# EAGLE board MAX3000A-CPLDbreakout-v1 (EAGLE 5.11)
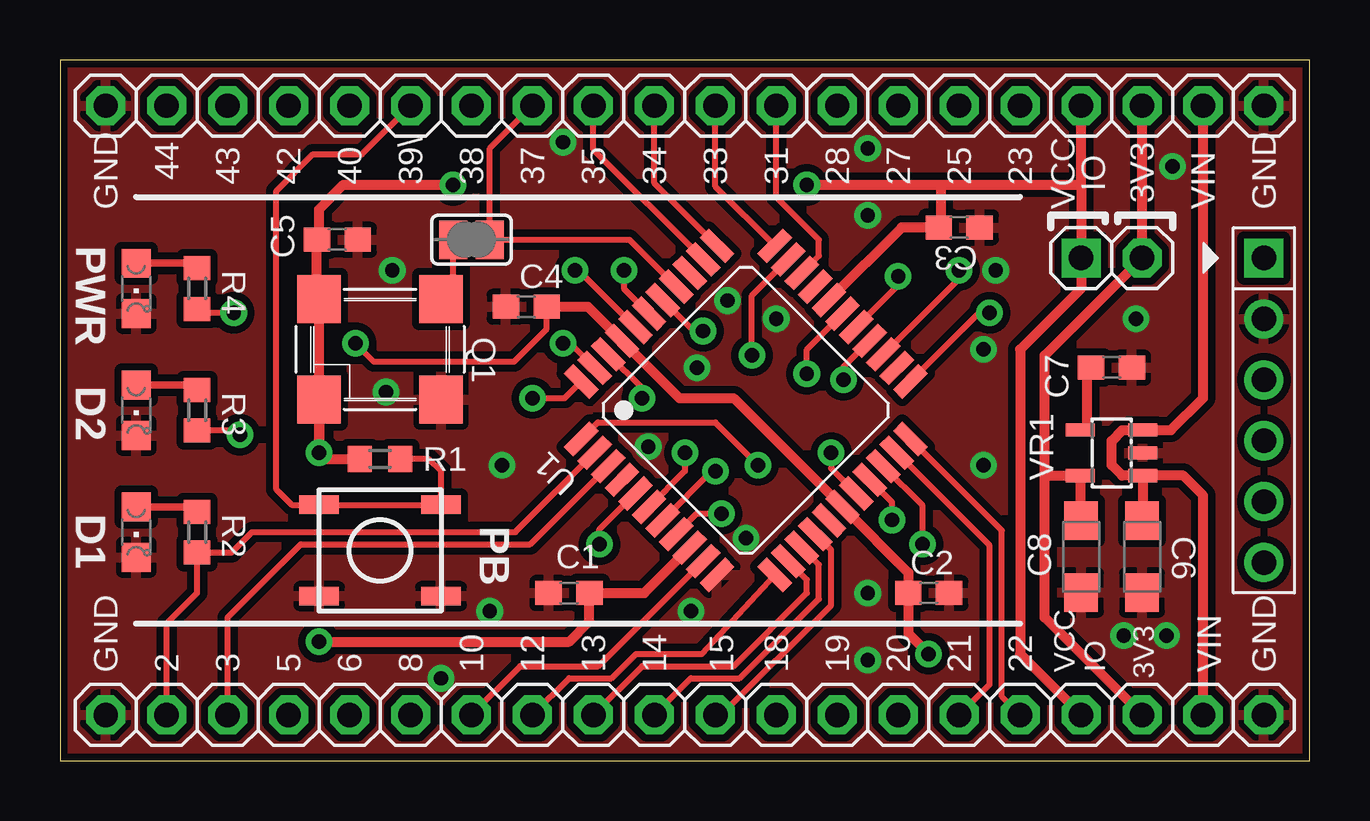
[diagram p0: board, top side]
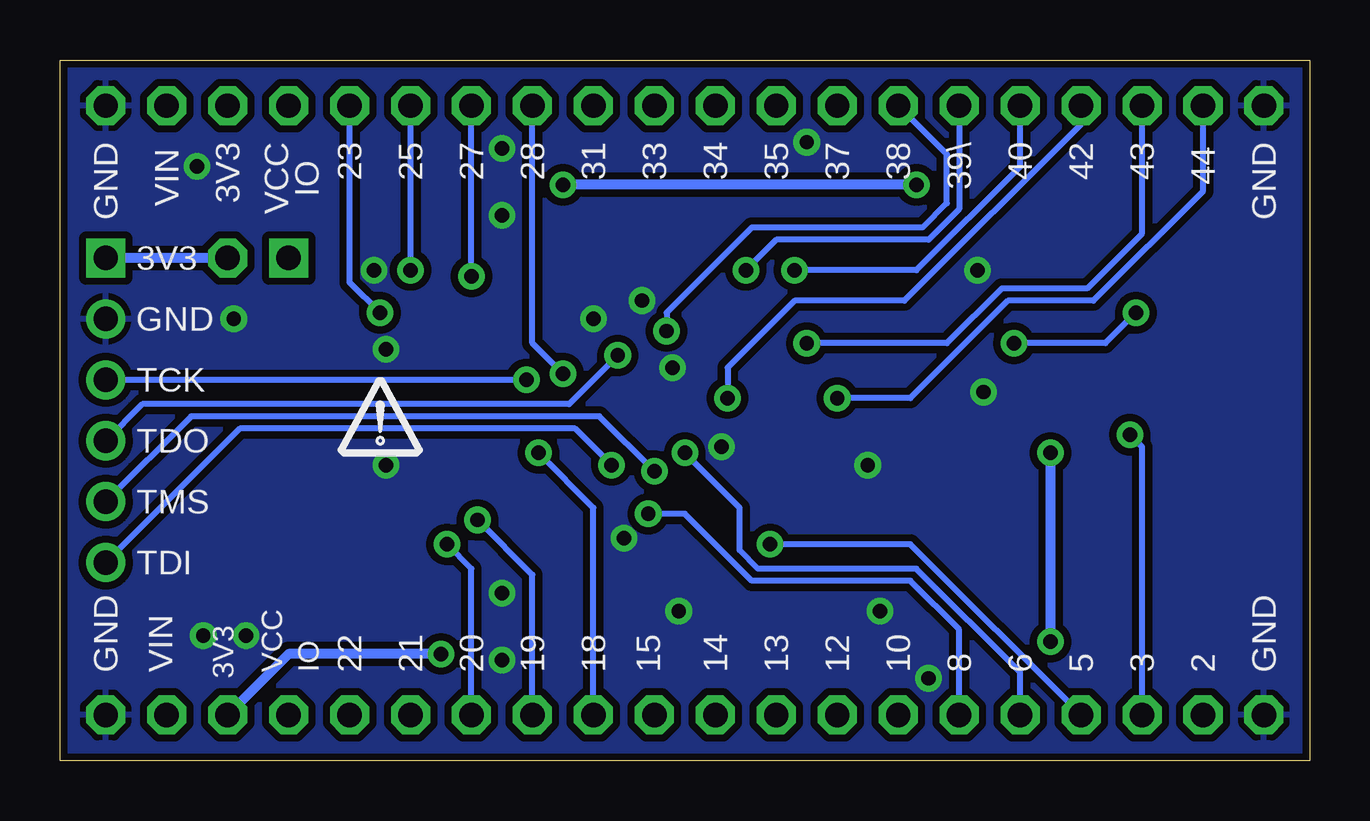
[diagram p1: board, bottom side, seen from below]

Size 52.07 x 29.21 mm. Coordinates in mm from the lower left corner, seen from the top.
Outline: 0,0 52.07,0 52.07,29.21 0,29.21 0,0
Copper layers (1*16): Top 0.035mm / dielectric 1.5mm / Bottom 0.035mm
Design rules "SparkFun": minimum track width 8mil, minimum drill 20mil, track to track 8mil, track to pad 8mil, pad to pad 8mil, via to via 8mil, smd to smd 8mil, copper to edge 10mil, drill to drill 8mil, minimum pad ring 12mil, minimum via ring 10mil, stop-mask expansion 4mil, vias tented up to drill 25mil, thermal gap 10mil

## Footprints (pad centres in the part's own frame; a part is rotated, then mirrored left to right if it is on the bottom)
C603 = smd 1.1 x 1: 1 -0.85,0; 2 0.85,0
SMC_A = smd 1.6 x 1.4: + -1.5,0; - 1.5,0
HEADER_PRG_1X06 = drill 1.016 square: 1 -6.35,0 | drill 1.016 round: 2 -3.81,0; 3 -1.27,0; 4 1.27,0; 5 3.81,0; 6 6.35,0
LED-805 = smd 1.2 x 1.2: A 0,-1.05; C 0,1.05
1X20 = drill 1.016 octagon: 1 -24.13,0; 2 -21.59,0; 3 -19.05,0; 4 -16.51,0; 5 -13.97,0; 6 -11.43,0; 7 -8.89,0; 8 -6.35,0; 9 -3.81,0; 10 -1.27,0; 11 1.27,0; 12 3.81,0; 13 6.35,0; 14 8.89,0; 15 11.43,0; 16 13.97,0; 17 16.51,0; 18 19.05,0; 19 21.59,0; 20 24.13,0
1X02-S = drill 1.016 square: 1 -1.27,0 | drill 1.016 octagon: 2 1.27,0
TACT_SWITCH_SMALL = smd 1.651 x 0.762: 1 -2.54,1.905; 2 2.54,1.905; 3 -2.54,-1.905; 4 2.54,-1.905
OSCILLATOR_7X5_SMD = smd 1.8 x 2: 1 -2.54,-2.1; 2 2.54,-2.1; 3 2.54,2.1; 4 -2.54,2.1
R603 = smd 1 x 1.1: 1 -0.85,0; 2 0.85,0
SJ = smd 1.168 x 1.6: 1 -0.762,0; 2 0.762,0
TQFP44 = smd 0.55 x 1.5: P1 -4,-5.7; P2 -3.2,-5.7; P3 -2.4,-5.7; P4 -1.6,-5.7; P5 -0.8,-5.7; P6 0,-5.7; P7 0.8,-5.7; P8 1.6,-5.7; P9 2.4,-5.7; P10 3.2,-5.7; P11 4,-5.7; P23 4,5.7; P24 3.2,5.7; P25 2.4,5.7; P26 1.6,5.7; P27 0.8,5.7; P28 0,5.7; P29 -0.8,5.7; P30 -1.6,5.7; P31 -2.4,5.7; P32 -3.2,5.7; P33 -4,5.7 | smd 1.5 x 0.55: P12 5.7,-4; P13 5.7,-3.2; P14 5.7,-2.4; P15 5.7,-1.6; P16 5.7,-0.8; P17 5.7,0; P18 5.7,0.8; P19 5.7,1.6; P20 5.7,2.4; P21 5.7,3.2; P22 5.7,4; P34 -5.7,4; P35 -5.7,3.2; P36 -5.7,2.4; P37 -5.7,1.6; P38 -5.7,0.8; P39 -5.7,0; P40 -5.7,-0.8; P41 -5.7,-1.6; P42 -5.7,-2.4; P43 -5.7,-3.2; P44 -5.7,-4
SOT-23-5 = smd 0.55 x 1.2: 1 -0.95,-1.3; 2 0,-1.3; 3 0.95,-1.3; 4 0.95,1.3; 5 -0.95,1.3

## Placement (x,y rotation side)
C1  0.1uF  [C603]  21.21,6.99 180 top
C2  0.1uF  [C603]  36.2,6.99 0 top
C3  0.1uF  [C603]  37.47,22.22 0 top
C4  0.1uF  [C603]  19.43,18.92 180 top
C5  0.1uF  [C603]  11.56,21.72 0 top
C6  3.3uF  [SMC_A]  45.09,8.51 270 top
C7  470pF  [C603]  43.82,16.38 0 top
C8  3.3uF  [SMC_A]  42.55,8.51 270 top
CON1  HEADER_PRG_XILINX_JTAG6  [HEADER_PRG_1X06]  50.16,14.61 270 top
D1  Yellow LED  [LED-805]  3.17,9.53 180 top
D2  Yellow LED  [LED-805]  3.17,14.61 180 top
IO1  [1X20]  26.04,27.3 0 top
IO2  [1X20]  26.04,1.91 0 top
JP1  [1X02-S]  43.82,20.95 0 top
PB  SMD button small  [TACT_SWITCH_SMALL]  13.34,8.76 180 top
PWR  Yellow LED  [LED-805]  3.17,19.68 180 top
Q1  OSC-OSCILLATOR  [OSCILLATOR_7X5_SMD]  13.34,17.14 0 top
R1  10K  [R603]  13.34,12.57 180 top
R2  2K  [R603]  5.71,9.53 270 top
R3  2K  [R603]  5.71,14.61 270 top
R4  2K  [R603]  5.71,19.68 270 top
SJ1  [SJ]  17.14,21.72 0 top
U1  EPM3064A-TQFP44  [TQFP44]  28.57,14.61 315 top
U$1  DP_LOGO  [DP_LOGO]  38.73,13.34 0 bottom
VR1  3.3 VREG  [SOT-23-5]  43.82,12.83 90 top

## Library data of the parts
C1-C8 CON1 D1 D2 PB PWR Q1 R1-R4 U1 VR1 = dp_devices
IO1 IO2 = pinhead
JP1 = pinhead-2
SJ1 = jumper
U$1 = dp_devices; FF1: fullfillment by; FF2: Seeed studio; FF3: www.seeedstudio.com; LICENSE: CC-BY-SA MAY 2011; PROJECT: Altera MAX3000A CPLD DEV BOARD v1.0; URL1: http://; URL2: DangerousPrototypes.com

## Nets
2: IO2.2 R2.2 U1.P2
3: IO2.3 R3.2 U1.P3
5: IO2.4 U1.P5
6: IO2.5 U1.P6
8: IO2.6 U1.P8
10: IO2.7 U1.P10
12: IO2.8 U1.P12
13: IO2.9 U1.P13
14: IO2.10 U1.P14
15: IO2.11 U1.P15
18: IO2.12 U1.P18
19: IO2.13 U1.P19
20: IO2.14 U1.P20
21: IO2.15 U1.P21
22: IO2.16 U1.P22
23: IO1.16 U1.P23
25: IO1.15 U1.P25
27: IO1.14 U1.P27
28: IO1.13 U1.P28
31: IO1.12 U1.P31
33: IO1.11 U1.P33
34: IO1.10 U1.P34
35: IO1.9 U1.P35
37: IO1.8 SJ1.2 U1.P37
38: IO1.7 U1.P38
39: IO1.6 PB.3 PB.4 R1.1 U1.P39
40: IO1.5 U1.P40
42: IO1.4 U1.P42
43: IO1.3 U1.P43
44: IO1.2 U1.P44
+3V3: C2.1 C4.1 C8.+ CON1.1 IO1.18 IO2.18 JP1.2 R4.2 U1.P17 U1.P41 VR1.5
GND: C1.2 C2.2 C3.2 C4.2 C5.2 C6.- C7.2 C8.- CON1.2 D1.C D2.C IO1.1 IO1.20 IO2.1 IO2.20 PB.1 PB.2 PWR.C Q1.2 U1.P4 U1.P11 U1.P16 U1.P24 U1.P30 U1.P36 VR1.2
JTAG_TCK: CON1.3 U1.P26
JTAG_TDI: CON1.6 U1.P1
JTAG_TDO: CON1.4 U1.P32
JTAG_TMS: CON1.5 U1.P7
N$1: D1.A R2.1
N$2: D2.A R3.1
N$3: PWR.A R4.1
N$5: Q1.3 SJ1.1
N$7: C7.1 VR1.4
VCCIO: C1.1 C3.1 C5.1 IO1.17 IO2.17 JP1.1 Q1.1 Q1.4 R1.2 U1.P9 U1.P29
VIN: C6.+ IO1.19 IO2.19 VR1.1 VR1.3

## Tracks (layer width: path | path; a pad name or v marks a point on that pad's centre or on a via)
2
  Top 0.254: U1.P2 18.97,9.53 8,9.53 7.15,8.68 R2.2 5.71,6.99 4.45,5.71 IO2.2
3  (via drill 0.6)
  Top 0.254: U1.P3 19.59,9.02 10.03,9.02 6.99,5.97 IO2.3 | R3.2 7.33,13.76 v7.49,13.59
  Bottom 0.254: v7.49,13.59 6.99,13.08 IO2.3
5  (via drill 0.6)
  Top 0.254: U1.P5 22.48,9.64 v22.48,9.02
  Bottom 0.254: v22.48,9.02 16.64,9.02 IO2.4
6  (via drill 0.6)
  Top 0.254: v26.04,12.83 26.04,12.06 U1.P6
  Bottom 0.254: IO2.5 12.06,3.68 16.38,8 22.99,8 23.75,8.76 23.75,10.54 v26.04,12.83
8  (via drill 0.6)
  Top 0.254: U1.P8 26.52,10.29 v27.56,10.29
  Bottom 0.254: IO2.6 14.61,5.46 16.64,7.49 23.24,7.49 26.04,10.29 v27.56,10.29
10
  Top 0.254: U1.P10 22.43,3.94 19.18,3.94 IO2.7
12
  Top 0.254: U1.P12 26.73,4.45 24,4.45 22.99,3.43 21.21,3.43 IO2.8
13
  Top 0.254: U1.P13 31.11,7.54 31.11,6.99 28.07,3.94 24.26,3.94 IO2.9
14
  Top 0.254: U1.P14 31.62,8.16 31.62,6.73 28.32,3.43 26.29,3.43 IO2.10
15
  Top 0.254: U1.P15 32.13,8.79 32.13,6.48 27.56,1.91 IO2.11
18  (via drill 0.6)
  Top 0.254: U1.P18 32.13,12.18 v32.13,12.83
  Bottom 0.254: v32.13,12.83 29.84,10.54 IO2.12
19  (via drill 0.6)
  Top 0.254: U1.P19 34.67,10.77 v34.67,10.03
  Bottom 0.254: v34.67,10.03 32.39,7.75 IO2.13
20  (via drill 0.6)
  Top 0.254: U1.P20 35.94,10.63 v35.94,9.02
  Bottom 0.254: IO2.14 34.93,8 v35.94,9.02
21
  Top 0.254: U1.P21 38.73,8.97 38.73,3.17 IO2.15
22
  Top 0.254: U1.P22 39.24,9.59 39.24,2.67 IO2.16
23  (via drill 0.6)
  Top 0.254: v38.73,18.67 38.3,18.67 U1.P23
  Bottom 0.254: IO1.16 40.01,19.94 v38.73,18.67
25  (via drill 0.6)
  Top 0.254: U1.P25 37.47,20.1 v37.47,20.45
  Bottom 0.254: v37.47,20.45 IO1.15
27  (via drill 0.6)
  Top 0.254: U1.P27 34.93,19.82 v34.93,20.19
  Bottom 0.254: v34.93,20.19 IO1.14
28  (via drill 0.6)
  Top 0.254: U1.P28 31.11,17.14 v31.11,16.13
  Bottom 0.254: IO1.13 32.39,17.4 v31.11,16.13
31
  Top 0.254: IO1.12 29.84,23.49 31.62,21.72 31.62,21.05 U1.P31
33
  Top 0.254: U1.P33 27.3,23.94 IO1.11
34
  Top 0.254: U1.P34 24.76,24.07 IO1.10
35
  Top 0.254: U1.P35 22.22,25.48 IO1.9
37
  Top 0.254: U1.P37 23.73,21.72 SJ1.2 17.91,25.53 IO1.8
38  (via drill 0.6)
  Top 0.254: U1.P38 26.4,17.91 v26.8,17.91
  Bottom 0.254: v26.8,17.91 26.8,18.67 23.24,22.22 16.13,22.22 15.11,23.24 15.11,25.27 IO1.7
39  (via drill 0.6)
  Top 0.254: U1.P39 23.49,19.68 v23.49,20.45 | R1.1 15.37,12.57 15.88,12.06 PB.3 PB.4 9.65,10.67 9.02,11.3 9.02,23.75 10.54,25.27 12.57,25.27 IO1.6
  Bottom 0.254: v23.49,20.45 22.22,21.72 15.88,21.72 14.61,22.99 IO1.6
40  (via drill 0.6)
  Top 0.254: U1.P40 21.6,20.45 v21.46,20.45
  Bottom 0.254: v21.46,20.45 16.38,20.45 12.06,24.76 IO1.5
42  (via drill 0.6)
  Top 0.254: v24.26,15.11 24.26,15.53 U1.P42
  Bottom 0.254: v24.26,15.11 24.26,16.38 21.46,19.18 16.89,19.18 9.53,26.54 IO1.4
43  (via drill 0.6)
  Top 0.254: U1.P43 21.25,17.4 v20.95,17.4
  Bottom 0.254: v20.95,17.4 15.11,17.4 12.83,19.68 9.27,19.68 6.99,21.97 IO1.3
44  (via drill 0.6)
  Top 0.254: U1.P44 21.02,15.11 v19.68,15.11
  Bottom 0.254: v19.68,15.11 16.64,15.11 12.57,19.18 9.02,19.18 4.45,23.75 IO1.2
+3V3  (via drill 0.6)
  Top 0.254: v7.24,18.67 5.88,18.67 R4.2 | C4.1 20.28,17.99 18.92,16.64 13.08,16.64 v12.32,17.4
  Top 0.406: C4.1 21.99,18.92 U1.P41 25.8,15.11 28.07,15.11 U1.P17 35.34,7.84 C2.1 35.34,5.29 v36.2,4.45 | C8.+ 42.52,10.04 VR1.5 41.09,11.88 41.02,11.81 | IO1.18 JP1.2 41.02,16.89 41.02,11.81 | 41.02,11.81 41.02,5.97 IO2.18
  Bottom 0.254: v12.32,17.4 8.51,17.4 v7.24,18.67
  Bottom 0.406: JP1.2 CON1.1 | v36.2,4.45 42.55,4.45 IO2.18
GND  (via drill 0.6)
  other vias: 46.36,24.76 44.32,5.21 46.1,5.21 38.99,20.45 28.57,9.27 26.29,6.22 17.91,6.22 15.88,3.43 27.81,19.18 33.66,22.73 33.66,25.53 20.95,25.78 26.54,16.38 29.84,18.41 44.83,18.41 38.48,12.32 38.48,17.14 24.51,13.08 33.66,6.99 33.66,4.19 18.41,12.32 13.59,15.37 13.84,20.45
  pour Bottom (isolate 0.305): -0.64,-0.64 52.71,-0.64 52.71,29.84 -0.64,29.84
  pour Top (isolate 0.305): -0.64,-0.64 52.71,-0.64 52.71,29.84 -0.64,29.84
JTAG_TCK  (via drill 0.6)
  Top 0.254: v32.64,15.88 32.64,16.41 U1.P26
  Bottom 0.254: v32.64,15.88 CON1.3
JTAG_TDI  (via drill 0.6)
  Top 0.254: U1.P1 22.41,14.1 27.3,14.1 v29.08,12.32
  Bottom 0.254: CON1.6 44.58,13.84 30.61,13.84 v29.08,12.32
JTAG_TDO  (via drill 0.6)
  Top 0.254: U1.P32 28.83,19.38 v28.83,16.89
  Bottom 0.254: v28.83,16.89 30.86,14.86 48.64,14.86 CON1.4
JTAG_TMS  (via drill 0.6)
  Top 0.254: v27.3,12.06 27.17,12.06 U1.P7
  Bottom 0.254: v27.3,12.06 29.59,14.35 46.61,14.35 CON1.5
N$1
  Top 0.305: D1.A 5.52,10.58 R2.1
N$2
  Top 0.305: D2.A 5.52,15.65 R3.1
N$3
  Top 0.305: PWR.A 5.52,20.73 R4.1
N$5
  Top 0.254: SJ1.1 16.38,19.75 Q1.3
N$7
  Top 0.406: 42.8,16.38 C7.1 42.8,16.22 42.8,13.84 42.73,13.78 VR1.4
VCCIO  (via drill 0.6)
  Top 0.406: U1.P9 24.35,6.99 C1.1 22.06,5.8 21.21,4.95 v10.79,4.95 | U1.P29 35.06,22.22 C3.1 36.7,22.22 36.7,24 | 42.55,24 JP1.1 42.55,19.68 40.01,17.14 40.01,4.45 IO2.17 | 42.55,24 IO1.17 | Q1.1 Q1.4 10.71,19.24 C5.1 10.79,21.63 10.79,22.99 11.81,24 v16.38,24 | Q1.1 10.79,13.34 | Q1.1 v10.79,12.83 11.05,12.57 R1.2 | v31.11,24 36.7,24 | 36.7,24 42.55,24
  Bottom 0.406: v10.79,4.95 v10.79,12.83 | v16.38,24 v31.11,24
VIN
  Top 0.406: C6.+ 45.12,10.01 VR1.1 | IO1.19 47.62,15.11 46.29,13.78 VR1.3 44.26,13.78 43.82,13.34 43.82,12.32 44.26,11.88 VR1.1 | VR1.1 46.8,11.88 47.62,11.05 IO2.19

## Text on the board
tNames: 44 | 43 | 42 | 40 | 39\ | 38 | 37 | 35 | 34 | 33 | 31 | 28 | 27 | 25 | 23 | GND | VCC | IO | 3V3 | VIN | GND | GND | 2 | 3 | 5 | 6 | 8 | 10 | 12 | 13 | 14 | 15 | 18 | 19 | 20 | 21 | 22 | VCC | IO | 3V3 | VIN | GND
bNames: GND | 43 | 42 | 40 | 39\ | 38 | 37 | 35 | 34 | 33 | 31 | 28 | 27 | 25 | 23 | IO | VCC | 3V3 | VIN | GND | 44 | 3V3 | GND | TCK | TDO | TMS | TDI | GND | 2 | 3 | 5 | 6 | 8 | 10 | 12 | 13 | 14 | 15 | 18 | 19 | 20 | 21 | 22 | IO | VCC | 3V3 | VIN | GND